# Altium PCB KATADC_V1-3.PcbDoc (part 6 of 7)
Units mm, origin at the board's own origin, x right, y up, seen from the top; angles counter-clockwise.
Board outline 127 x 85.85 mm, 6 copper layers (Top Layer, InnerPlane1, InnerPlane2, InnerPlane3, InnerPlane4, Bottom Layer), stack 1.255 mm thick; 189 components, 188 nets, 905 pads, 1090 vias.
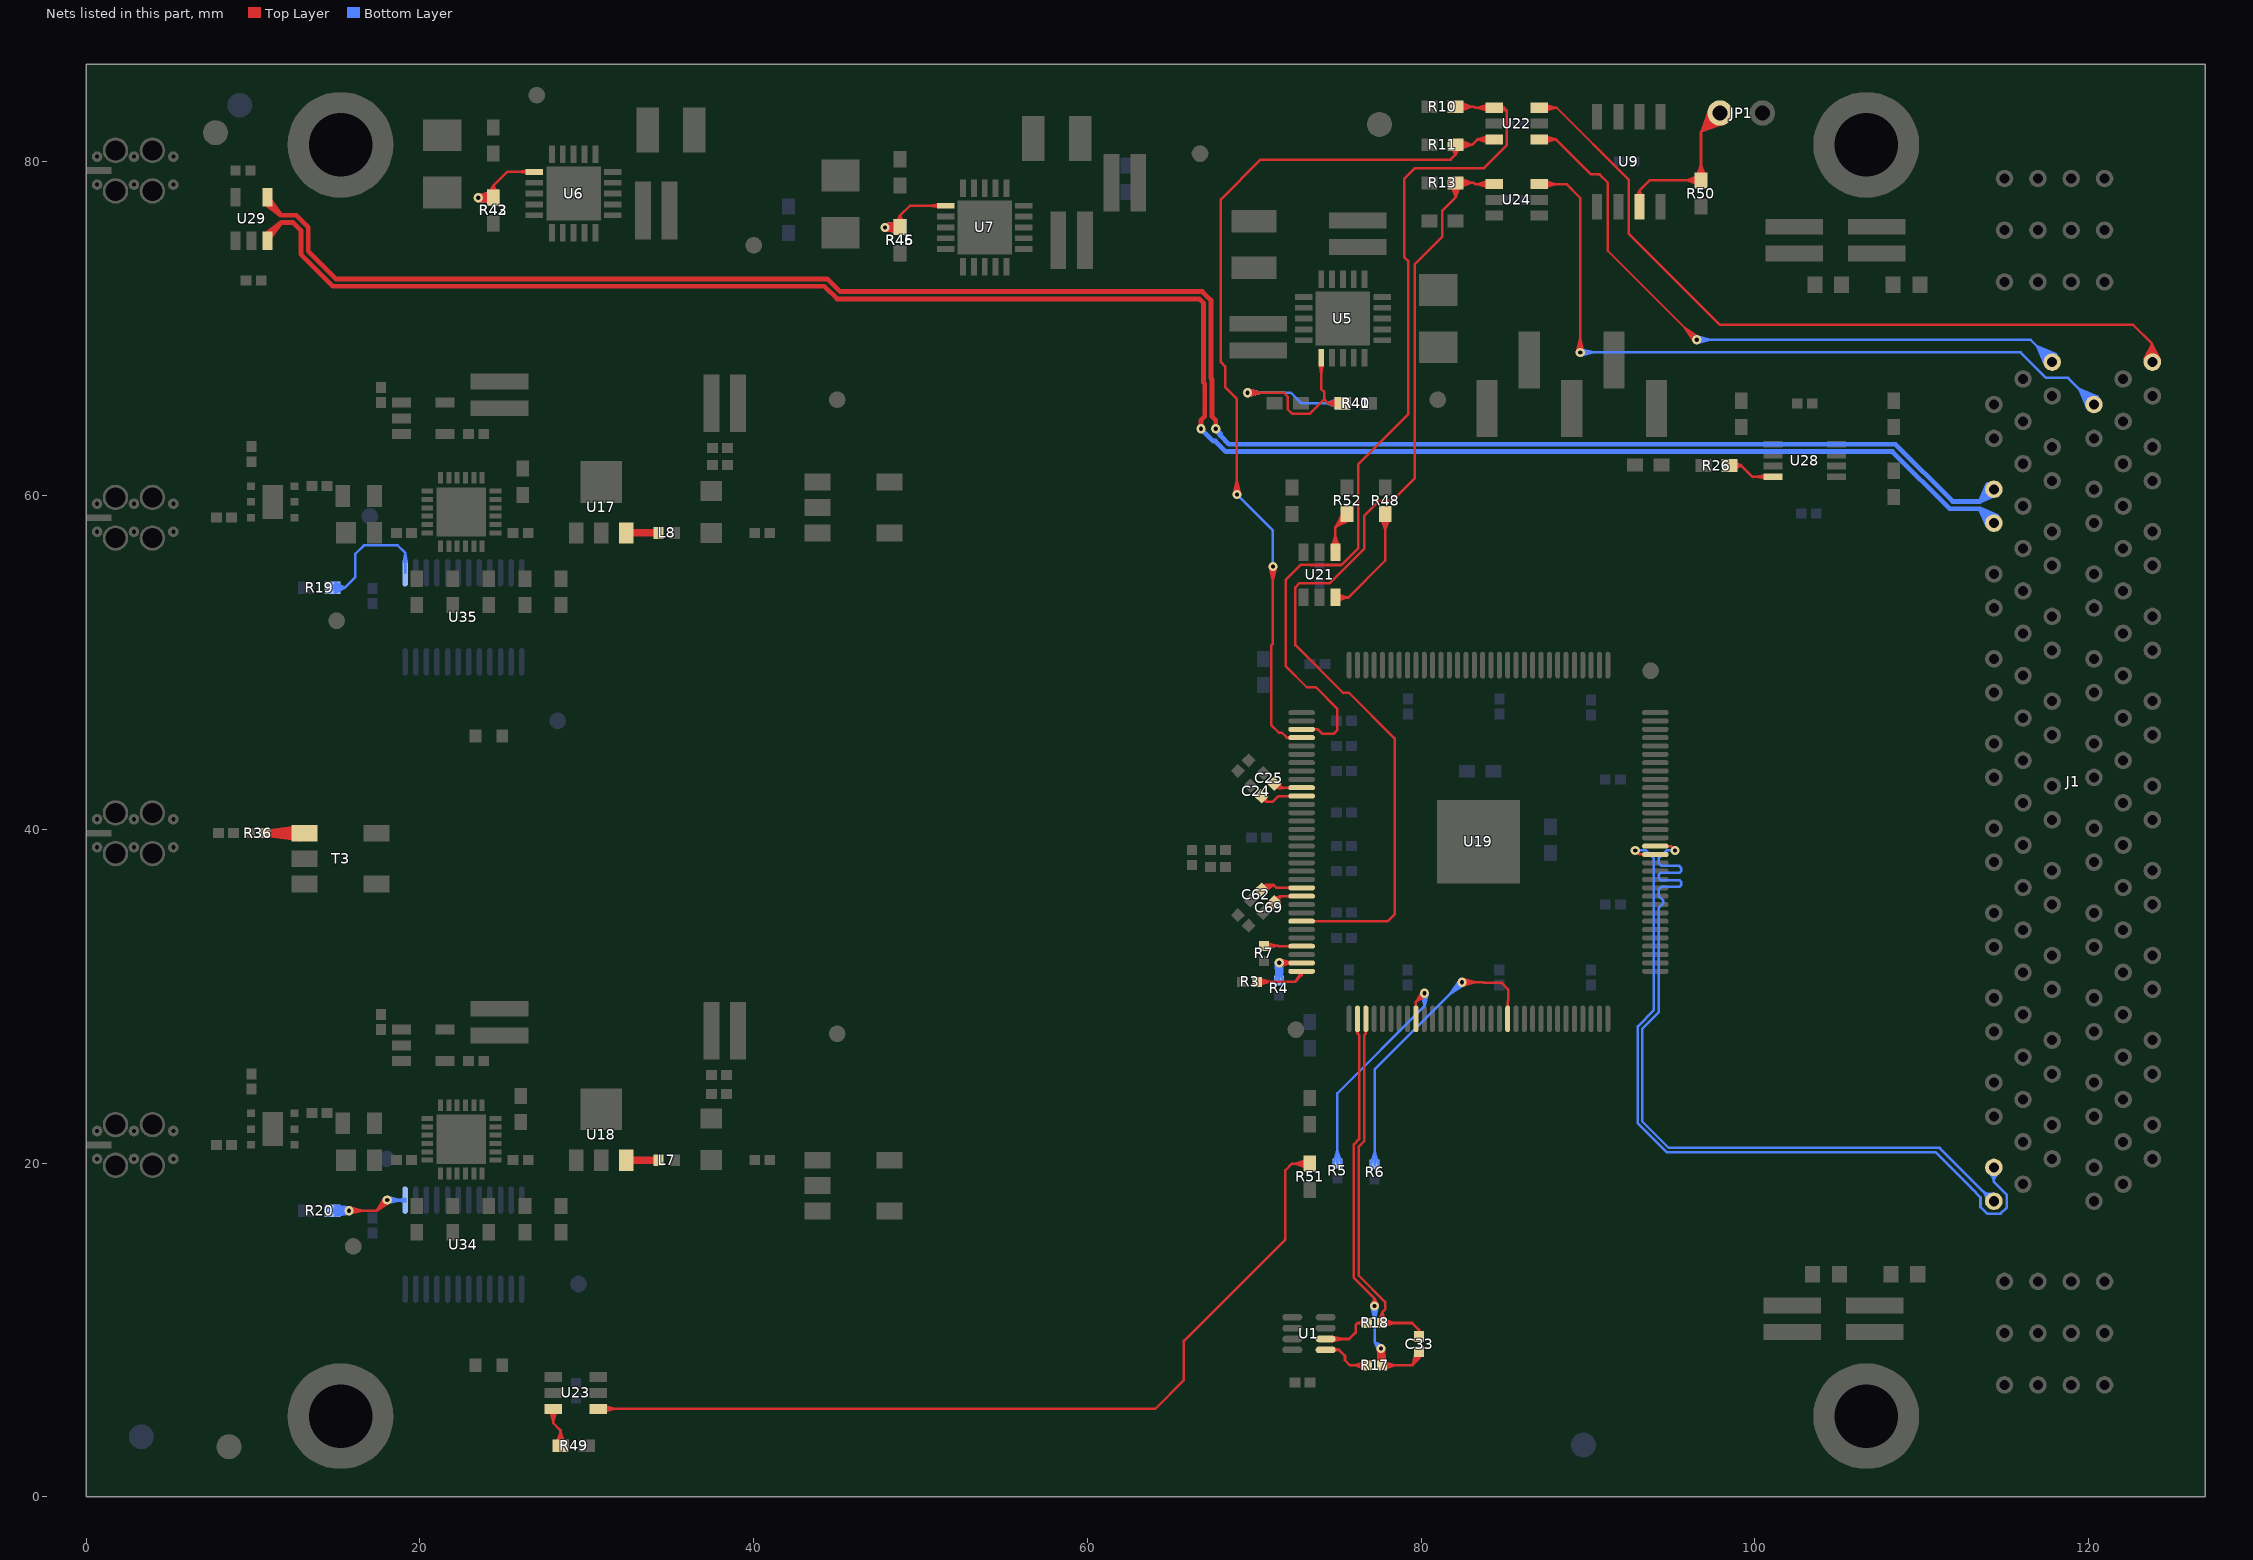
[diagram p10: the nets of this part, all layers, seen from the top]

## Via types
v1: diameter 0.55, hole 0.25, Top Layer to Bottom Layer, tented both sides, 1066 vias
v2: diameter 3.302, hole 2.2, Top Layer to Bottom Layer, tented both sides, 18 vias
v3: diameter 0.65, hole 0.25, Top Layer to Bottom Layer, tented both sides, 4 vias
v4: diameter 0.51, hole 0.25, Top Layer to Bottom Layer, tented both sides, 1 vias
v5: diameter 0.55, hole 0.25, Top Layer to Bottom Layer, 1 vias

## Nets (pads, with @x,y where several pads share a name; then routed paths per layer and width w, separated by ;. In a path a pad name is that pad's centre, name@x,y a point inside that pad or via, vN(x,y) a via of type N, cw(c..) or ccw(c..) an arc to the next point about the centre after c; other vN are vias at no path point) (continued)
NetJP1_1: JP1.1 R50.2 U9.7 | length 30.8
  Top Layer w0.152: U9.7@92.873,77.835 93.091,78.288 ; U9.7@93.091,77.31 93.091,78.288 ; U9.7@93.091,77.785 93.091,78.288 ; U9.7@93.309,77.835 93.091,78.288 ; R50.2@96.474,79.049 96.774,79.832 ; R50.2@96.622,79.008 96.774,79.832 ; R50.2@96.719,78.593 95.936,78.892 ; R50.2@96.719,79.192 95.936,78.892 ; R50.2@96.76,78.741 95.936,78.892 ; R50.2@96.76,79.044 95.936,78.892 ; R50.2@96.774,78.994 96.774,79.832 ; R50.2@96.926,79.008 96.774,79.832 ; R50.2@97.074,79.049 96.774,79.832 ; JP1.1@97.336,83.295 96.832,81.846 ; JP1.1@97.48,83.237 96.832,81.846 ; JP1.1@97.616,83.165 96.832,81.846 ; JP1.1@97.744,83.08 96.832,81.846 ; JP1.1@97.917,82.931 96.774,81.788 R50.2@96.774,78.892 93.695,78.892 93.091,78.288 ; JP1.1@98.066,82.758 96.832,81.846 ; JP1.1@98.151,82.63 96.832,81.846 ; JP1.1@98.223,82.494 96.832,81.846 ; JP1.1@98.281,82.35 96.832,81.846
NetL7_1: L7.1 U18.3 | length 3.6
  Top Layer w0.443: U18.3@32.36,20.172 L7.1@34.298,20.172 U18.3@32.668,20.172
NetL8_1: L8.1 U17.3 | length 7
  Top Layer w0.443: U17.3@32.667,57.768 L8.1@34.298,57.764 ; U17.3@32.668,57.785 L8.1@34.298,57.764 ; L8.1@34.121,57.785 U17.3@32.36,57.764 32.36,57.785 34.29,57.785 L8.1@34.298,57.764
NetR3_2: R3.2 U19.32 | length 5.5
  Top Layer w0.152: R3.2@70.173,30.861 72.433,30.861 72.839,31.267 ; R3.2@70.206,30.64 70.93,30.861 R3.2@70.206,31.082 ; 72.478,30.906 U19.32@72.839,31.493 ; 72.839,31.267 U19.32@72.839,31.493 ; 72.839,31.267 U19.32@72.839,31.493
NetR4_2: R4.2 U19.31 | length 16.8
  Top Layer w0.152: v1@71.523,31.807 U19.31@72.335,31.998 ; v1@71.527,31.807 U19.31@72.189,31.993 ; v1@71.526,32.201 U19.31@72.335,31.998 ; v1@71.533,32.2 U19.31@72.189,31.993 ; v1@71.582,31.998 U19.31@72.189,31.993 ; U19.31@72.839,31.993 72.839,31.998 71.501,31.998 v1(71.501,32.004) ; v1(71.501,32.004) U19.31@72.335,31.998 ; v1(71.501,32.004) U19.31@72.189,31.993
  Bottom Layer w0.152: R4.2@71.254,30.963 71.476,31.687 R4.2@71.697,30.963 ; v1@71.303,31.986 R4.2@71.476,31.17 ; v1@71.303,32.024 R4.2@71.316,31.166 ; v1@71.31,31.95 R4.2@71.642,31.142 ; R4.2@71.476,30.93 71.476,31.979 v1(71.501,32.004) ; v1@71.689,31.939 R4.2@71.316,31.166 ; v1@71.698,31.974 R4.2@71.476,31.17 ; v1@71.7,32.014 R4.2@71.642,31.142 ; R4.2@71.316,31.166 v1(71.501,32.004) ; R4.2@71.476,31.17 v1(71.501,32.004) ; v1(71.501,32.004) R4.2@71.642,31.142
NetR5_2: R5.2 U19.41 | length 19.7
  Top Layer w0.152: U19.41@79.689,28.643 79.689,29.651 ; U19.41@79.689,29.293 79.689,29.651 ; v1@80.055,30.296 79.689,29.651 ; v1@80.334,30.017 79.689,29.651 ; 79.689,29.651 v1(80.213,30.175) 79.689,29.651
  Bottom Layer w0.152: R5.2@74.759,20.016 74.981,20.74 R5.2@75.202,20.016 ; R5.2@74.981,19.983 74.981,24.182 80.213,29.414 ; v1@80.016,30.149 80.213,29.414 ; v1(80.213,30.175) 80.213,29.414 ; v1@80.41,30.149 80.213,29.414
NetR6_2: R6.2 U19.52 | length 24.4
  Top Layer w0.152: v1(82.448,30.836) 83.718,30.836 83.744,30.81 84.811,30.81 85.213,30.408 85.213,29.718 85.189,29.694 ; v1@82.472,30.638 83.282,30.836 v1@82.472,31.033 ; U19.52@85.189,28.643 85.189,29.694 ; U19.52@85.189,29.293 85.189,29.694
  Bottom Layer w0.152: R6.2@76.995,19.939 77.216,20.664 R6.2@77.437,19.939 ; R6.2@77.216,19.906 77.216,25.612 82.444,30.84 v1(82.448,30.836) 81.744,30.14 ; v1@82.295,30.962 81.744,30.14 ; v1@82.573,30.681 81.744,30.14
NetR7_2: R7.2 U19.29 | length 4.4
  Top Layer w0.152: R7.2@70.579,33.011 71.45,33.011 71.468,32.993 U19.29@72.839,32.993 ; R7.2@70.612,32.789 71.336,33.011 R7.2@70.612,33.232 ; 71.582,32.993 U19.29@72.189,32.993
NetR17_1: R17.1 U1.1 | length 5.8
  Top Layer w0.152: U1.1@74.279,8.804 75.082,8.804 ; U1.1@74.679,8.804 75.082,8.804 ; U1.1@74.698,8.682 75.082,8.804 ; U1.1@74.698,8.926 75.082,8.804 ; R17.1@76.733,7.653 76.009,7.874 R17.1@76.733,8.095 ; R17.1@76.766,7.874 75.743,7.874 75.438,8.179 75.438,8.448 75.082,8.804
NetR18_1: R18.1 U1.2 | length 6.3
  Top Layer w0.152: U1.2@74.279,9.454 75.692,9.454 76.073,9.835 76.073,10.287 76.2,10.414 ; U1.2@74.679,9.454 75.336,9.454 ; U1.2@74.691,9.331 75.336,9.454 ; U1.2@74.691,9.577 75.336,9.454 ; R18.1@76.722,10.195 76.2,10.414 ; R18.1@76.722,10.633 76.2,10.414 ; R18.1@76.766,10.414 76.2,10.414
NetR19_2: R19.2 U35.1 | length 12.4
  Bottom Layer w0.152: R19.2@14.757,54.483 15.494,54.483 ; R19.2@14.859,54.483 15.494,54.483 ; R19.2@14.877,54.332 15.494,54.483 ; R19.2@14.877,54.634 15.494,54.483 ; R19.2@14.932,54.187 15.494,54.483 ; R19.2@14.932,54.779 15.494,54.483 ; U35.1@19.025,56.04 19.113,56.578 ; U35.1@19.113,55.372 19.113,56.578 ; U35.1@19.113,56.032 19.113,56.578 ; U35.1@19.202,56.04 19.113,56.578 ; 15.494,54.483 16.129,55.118 16.129,56.515 16.637,57.023 18.669,57.023 19.113,56.578
NetR20_2: R20.2 U34.1 | length 30.4
  Top Layer w0.152: v1(15.748,17.145) 17.399,17.145 ; v1@15.772,16.948 16.582,17.145 v1@15.772,17.342 ; v1@17.879,17.904 17.399,17.145 ; v1@18.158,17.625 17.399,17.145 ; 17.399,17.145 v1(18.034,17.78) 17.399,17.145
  Bottom Layer w0.152: R20.2@14.757,17.145 v1(15.748,17.145) ; R20.2@14.859,17.145 v1@15.697,17.145 ; R20.2@14.873,16.993 v1@15.697,17.145 ; R20.2@14.873,17.297 v1@15.697,17.145 ; R20.2@14.914,16.845 v1@15.697,17.145 ; R20.2@14.914,17.445 v1@15.697,17.145 ; v1@15.66,16.967 R20.2@14.941,17.435 ; v1@15.66,17.323 R20.2@14.941,16.855 ; v1@15.691,16.955 R20.2@14.921,17.288 ; v1@15.691,17.335 R20.2@14.921,17.002 ; v1@15.758,16.947 R20.2@14.921,17.002 ; v1@15.758,17.343 R20.2@14.921,17.288 ; v1@15.793,16.951 R20.2@14.941,16.855 ; v1@15.793,17.339 R20.2@14.941,17.435 ; v1(18.034,17.78) U34.1@19.113,17.78 ; v1@18.058,17.583 18.868,17.78 v1@18.058,17.977 ; U34.1@19.107,17.691 18.491,17.78 U34.1@19.107,17.869 ; R20.2@14.914,17.145 15.724,16.948 R20.2@14.914,17.145 ; R20.2@14.914,17.145 15.724,17.342 R20.2@14.914,17.145 ; R20.2@14.914,17.145 v1(15.748,17.145) ; R20.2@14.921,17.002 v1(15.748,17.145) ; R20.2@14.921,17.288 v1(15.748,17.145) ; R20.2@14.941,16.855 v1(15.748,17.145) ; R20.2@14.941,17.435 v1(15.748,17.145)
NetR26_1: R26.1 U28.8 | length 7.8
  Top Layer w0.152: R26.1@98.489,61.804 99.177,61.804 ; R26.1@98.591,61.804 99.177,61.804 ; R26.1@98.611,61.653 99.177,61.804 ; R26.1@98.611,61.955 99.177,61.804 ; R26.1@98.67,61.51 99.177,61.804 ; R26.1@98.67,62.098 99.177,61.804 ; U28.8@100.71,61.005 100.065,61.128 ; U28.8@100.71,61.251 100.065,61.128 ; U28.8@100.722,61.128 100.065,61.128 ; U28.8@101.097,61.128 99.853,61.128 99.177,61.804
NetR36_2: R36.2 T3.1 | length 12.7
  Top Layer w0.443: T3.1@12.363,39.554 R36.2@10.737,39.767 ; T3.1@12.363,39.98 R36.2@10.737,39.767 ; T3.1@12.367,39.767 R36.2@10.737,39.767 ; T3.1@12.785,39.489 R36.2@10.976,39.767 ; T3.1@12.785,40.045 R36.2@10.976,39.767 ; T3.1@12.806,39.767 R36.2@10.976,39.767 ; T3.1@13.081,39.767 R36.2@10.737,39.767
NetR40_2: R40.2 R41.2 U5.16 | length 28.9
  Top Layer w0.152: v1(69.596,66.167) 71.773,66.167 72.009,65.931 72.009,65.168 72.28,64.897 73.312,64.897 74.201,65.786 ; v1@69.62,65.97 70.43,66.167 v1@69.62,66.364 ; U5.16@73.913,67.904 74.011,67.28 ; U5.16@74.011,67.912 74.011,67.28 ; U5.16@74.011,68.262 74.011,66.4 74.201,66.21 74.201,65.786 ; U5.16@74.109,67.904 74.011,67.28 ; R40.2@75.123,65.233 74.422,65.532 ; R40.2@75.123,65.831 74.422,65.532 ; R40.2@75.169,65.38 74.422,65.532 ; R40.2@75.169,65.684 74.422,65.532 ; R40.2@75.184,65.532 74.422,65.532 ; R40.2@75.286,65.532 74.422,65.532 ; 74.201,65.786 74.201,65.753 74.422,65.532
  Bottom Layer w0.152: v1(69.596,66.167) 72.188,66.167 72.823,65.532 R41.2@75.286,65.532 ; v1@69.62,65.97 70.43,66.167 v1@69.62,66.364 ; R41.2@75.129,65.232 74.346,65.532 ; R41.2@75.129,65.832 74.346,65.532 ; R41.2@75.17,65.38 74.346,65.532 ; R41.2@75.17,65.684 74.346,65.532 ; R41.2@75.184,65.532 74.346,65.532
NetR42_2: R42.2 R43.2 U6.16 | length 47.3
  Top Layer w0.152: v1@23.444,78.043 R42.2@24.298,78.165 ; v1@23.456,77.656 R42.2@24.306,77.586 ; v1@23.479,78.049 R42.2@24.32,78.018 ; v1@23.49,77.652 R42.2@24.324,77.732 ; v1@23.513,78.049 R42.2@24.329,77.875 ; v1@23.519,77.654 24.329,77.851 v1@23.519,78.048 ; v1@23.524,77.654 R42.2@24.329,77.875 ; v1@23.546,78.043 R42.2@24.324,77.732 ; v1@23.557,77.662 R42.2@24.32,78.018 ; v1@23.578,78.031 R42.2@24.306,77.586 ; v1@23.588,77.676 R42.2@24.298,78.165 ; R42.2@24.09,78.058 24.384,78.562 ; R42.2@24.233,77.998 24.384,78.562 ; R42.2@24.32,78.174 v1@23.546,77.851 ; R42.2@24.338,77.575 v1@23.546,77.851 ; R42.2@24.366,78.028 v1@23.546,77.851 ; R42.2@24.375,77.724 v1@23.546,77.851 ; R42.2@24.384,77.978 24.384,78.562 ; R42.2@24.535,77.998 24.384,78.562 ; R42.2@24.678,78.058 24.384,78.562 ; U6.16@26.502,79.307 25.878,79.405 ; U6.16@26.502,79.503 25.878,79.405 ; U6.16@26.51,79.405 25.878,79.405 ; U6.16@26.86,79.405 25.227,79.405 24.384,78.562 ; v1(23.495,77.851) 24.384,77.851 R42.2@24.384,77.876 ; v1(23.495,77.851) R42.2@24.306,77.586 ; v1(23.495,77.851) R42.2@24.298,78.165 ; v1(23.495,77.851) R42.2@24.324,77.732 ; v1(23.495,77.851) R42.2@24.32,78.018 ; v1(23.495,77.851) R42.2@24.329,77.875 ; v1@23.546,77.851 R42.2@24.384,77.876 ; R42.2@24.384,77.876 24.384,78.562
  Bottom Layer w0.152: v1@23.444,78.043 R43.2@24.298,78.165 ; v1@23.456,77.656 R43.2@24.306,77.586 ; v1@23.479,78.049 R43.2@24.32,78.018 ; v1@23.49,77.652 R43.2@24.324,77.732 ; v1@23.513,78.049 R43.2@24.329,77.875 ; v1@23.519,77.654 24.329,77.851 v1@23.519,78.048 ; v1@23.524,77.654 R43.2@24.329,77.875 ; v1@23.546,78.043 R43.2@24.324,77.732 ; v1@23.557,77.662 R43.2@24.32,78.018 ; v1@23.578,78.031 R43.2@24.306,77.586 ; v1@23.588,77.676 R43.2@24.298,78.165 ; R43.2@24.32,78.174 v1@23.546,77.851 ; R43.2@24.338,77.575 v1@23.546,77.851 ; R43.2@24.366,78.028 v1@23.546,77.851 ; R43.2@24.375,77.724 v1@23.546,77.851 ; v1(23.495,77.851) 24.384,77.851 R43.2@24.384,77.876 v1@23.546,77.851 ; v1(23.495,77.851) R43.2@24.306,77.586 ; v1(23.495,77.851) R43.2@24.298,78.165 ; v1(23.495,77.851) R43.2@24.324,77.732 ; v1(23.495,77.851) R43.2@24.32,78.018 ; v1(23.495,77.851) R43.2@24.329,77.875
NetR45_2: R45.2 R46.2 U7.16 | length 47.4
  Top Layer w0.152: v1@47.828,76.265 R45.2@48.682,76.387 ; v1@47.84,75.878 R45.2@48.69,75.808 ; v1@47.863,76.271 R45.2@48.704,76.24 ; v1@47.874,75.874 R45.2@48.708,75.954 ; v1@47.897,76.271 R45.2@48.713,76.097 ; v1@47.903,75.876 48.713,76.073 v1@47.903,76.27 ; v1@47.908,75.876 R45.2@48.713,76.097 ; v1@47.93,76.265 R45.2@48.708,75.954 ; v1@47.941,75.884 R45.2@48.704,76.24 ; v1@47.962,76.253 R45.2@48.69,75.808 ; v1@47.972,75.898 R45.2@48.682,76.387 ; R45.2@48.474,76.28 48.768,76.784 ; R45.2@48.617,76.22 48.768,76.784 ; R45.2@48.704,76.396 v1@47.93,76.073 ; R45.2@48.722,75.797 v1@47.93,76.073 ; R45.2@48.75,76.25 v1@47.93,76.073 ; R45.2@48.759,75.946 v1@47.93,76.073 ; R45.2@48.768,76.2 48.768,76.784 ; R45.2@48.919,76.22 48.768,76.784 ; R45.2@49.062,76.28 48.768,76.784 ; U7.16@51.14,77.275 50.516,77.373 ; U7.16@51.14,77.471 50.516,77.373 ; U7.16@51.148,77.373 50.516,77.373 ; U7.16@51.498,77.373 49.357,77.373 48.768,76.784 ; v1(47.879,76.073) 48.768,76.073 R45.2@48.768,76.098 ; v1(47.879,76.073) R45.2@48.69,75.808 ; v1(47.879,76.073) R45.2@48.682,76.387 ; v1(47.879,76.073) R45.2@48.708,75.954 ; v1(47.879,76.073) R45.2@48.704,76.24 ; v1(47.879,76.073) R45.2@48.713,76.097 ; v1@47.93,76.073 R45.2@48.768,76.098 ; R45.2@48.768,76.098 48.768,76.784
  Bottom Layer w0.152: v1@47.828,76.265 R46.2@48.682,76.387 ; v1@47.84,75.878 R46.2@48.69,75.808 ; v1@47.863,76.271 R46.2@48.704,76.24 ; v1@47.874,75.874 R46.2@48.708,75.954 ; v1@47.897,76.271 R46.2@48.713,76.097 ; v1@47.903,75.876 48.713,76.073 v1@47.903,76.27 ; v1@47.908,75.876 R46.2@48.713,76.097 ; v1@47.93,76.265 R46.2@48.708,75.954 ; v1@47.941,75.884 R46.2@48.704,76.24 ; v1@47.962,76.253 R46.2@48.69,75.808 ; v1@47.972,75.898 R46.2@48.682,76.387 ; R46.2@48.704,76.396 v1@47.93,76.073 ; R46.2@48.722,75.797 v1@47.93,76.073 ; R46.2@48.75,76.25 v1@47.93,76.073 ; R46.2@48.759,75.946 v1@47.93,76.073 ; v1(47.879,76.073) 48.768,76.073 R46.2@48.768,76.098 v1@47.93,76.073 ; v1(47.879,76.073) R46.2@48.69,75.808 ; v1(47.879,76.073) R46.2@48.682,76.387 ; v1(47.879,76.073) R46.2@48.708,75.954 ; v1(47.879,76.073) R46.2@48.704,76.24 ; v1(47.879,76.073) R46.2@48.713,76.097
NetR48_1: R48.1 U21.3 | length 12.4
  Top Layer w0.152: U21.3@74.864,53.895 75.638,53.895 77.851,56.108 R48.1@77.851,58.903 ; U21.3@74.897,53.674 75.621,53.895 U21.3@74.897,54.116 ; R48.1@77.551,58.746 77.851,57.963 ; R48.1@77.699,58.787 77.851,57.963 ; R48.1@77.851,58.801 77.851,57.963 ; R48.1@78.003,58.787 77.851,57.963 ; R48.1@78.151,58.746 77.851,57.963
NetR49_1: R49.1 U23.3 | length 7.3
  Top Layer w0.152: U23.3@27.766,5.24 27.987,4.516 U23.3@28.208,5.24 ; U23.3@27.987,5.273 27.987,4.419 28.423,3.983 R49.1@28.423,3.048 ; R49.1@28.123,3.103 28.423,3.886 ; R49.1@28.271,3.062 28.423,3.886 ; R49.1@28.574,3.062 28.423,3.886 ; R49.1@28.722,3.103 28.423,3.886
NetR51_2: R51.2 U23.4 | length 58.2
  Top Layer w0.152: U23.4@30.687,5.273 64.074,5.273 65.786,6.985 65.786,9.347 71.831,15.392 71.857,15.392 71.857,19.558 72.263,19.964 R51.2@73.33,19.964 ; U23.4@30.912,5.273 31.669,5.273 ; U23.4@30.945,5.052 31.669,5.273 ; U23.4@30.945,5.494 31.669,5.273 ; R51.2@73.274,19.665 72.492,19.964 ; R51.2@73.274,20.264 72.492,19.964 ; R51.2@73.316,19.813 72.492,19.964 ; R51.2@73.316,20.116 72.492,19.964
NetR52_2: R52.2 U21.4 | length 9.7
  Top Layer w0.152: U21.4@74.643,56.853 74.864,57.577 ; U21.4@74.864,56.595 74.864,58.1 R52.2@75.565,58.801 ; U21.4@74.864,56.82 74.864,57.577 ; U21.4@75.085,56.853 74.864,57.577 ; R52.2@75.318,58.98 74.883,58.119 ; R52.2@75.449,58.9 74.883,58.119 ; R52.2@75.565,58.903 R52.2@75.565,58.801 ; R52.2@75.664,58.685 74.883,58.119 ; R52.2@75.744,58.554 74.883,58.119 ; 74.883,58.119 R52.2@75.565,58.801
OR+/DCLK2+: J1.F19 U19.79 | length 48.1
  Top Layer w0.152: v1(92.837,38.735) 93.079,38.493 U19.79@94.039,38.493
  Bottom Layer w0.152: v1(92.837,38.735) 93.472,38.735 93.955,38.252 93.955,29.159 92.991,28.196 92.991,22.376 94.715,20.652 106.959,20.652 ; 107.033,20.652 106.959,20.652 ; 113.081,18.39 112.979,18.491 ; J1.F19@113.975,19.475 114.147,19.303 cw(c113.716,18.873) 114.325,18.873 ; J1.F19@114.325,19.74 114.325,18.873 ; J1.F19@114.675,19.475 114.503,19.303 ccw(c114.934,18.873) 114.325,18.873 ; 106.959,20.652 110.819,20.652 112.979,18.491 ; 112.979,18.491 113.525,17.945 113.525,17.361 113.919,16.967 114.732,16.967 115.113,17.348 115.113,18.085 114.325,18.873
OR-/DCLK2-: J1.F20 U19.80 | length 49.1
  Top Layer w0.152: U19.80@94.039,38.993 94.971,38.993 ; U19.80@94.689,38.993 94.971,38.993 ; v1(95.225,38.735) 95.225,38.739 94.971,38.993
  Bottom Layer w0.152: 95.148,36.551 94.386,36.551 94.234,36.398 94.234,36.017 94.513,35.738 94.513,35.56 94.234,35.281 94.234,29.032 93.243,28.042 93.243,22.504 94.844,20.904 111.074,20.904 113.679,18.299 ; 95.174,36.551 95.479,36.551 95.58,36.652 95.58,36.855 95.479,36.957 94.361,36.957 94.234,37.084 94.234,37.262 94.361,37.389 95.479,37.389 95.58,37.49 95.58,37.694 95.453,37.821 94.386,37.821 94.234,37.973 94.234,38.252 94.717,38.735 v1(95.225,38.735) ; 113.68,18.299 114.297,17.682 J1.F20@114.3,17.678 ; J1.F20@113.875,17.6 113.875,17.826 ccw(c113.206,17.826) 113.68,18.299 ; J1.F20@113.9,17.65 113.9,17.766 ccw(c113.146,17.766) 113.68,18.298 ; J1.F20@114.325,18.15 114.04,18.15 cw(c114.04,18.66) 113.68,18.298
PD_19: R13.2 U19.26 U24.4 | length 70.5
  Top Layer w0.152: U19.26@72.839,34.493 78.003,34.493 78.41,34.9 78.41,45.449 75.675,48.184 75.317,48.184 72.461,51.04 72.461,54.504 72.694,54.737 74.513,54.737 76.581,56.805 76.581,58.784 77.487,59.69 78.25,59.69 79.629,61.069 79.629,73.876 81.28,75.527 81.28,77.089 82.067,77.876 R13.2@82.067,78.74 83.167,78.74 83.233,78.674 U24.4@84.375,78.674 ; U19.26@73.489,34.493 74.096,34.493 ; R13.2@81.768,78.685 82.067,77.902 ; R13.2@81.916,78.726 82.067,77.902 ; R13.2@82.169,78.74 83.007,78.74 ; R13.2@82.183,78.588 83.007,78.74 ; R13.2@82.183,78.892 83.007,78.74 ; R13.2@82.219,78.726 82.067,77.902 ; R13.2@82.224,78.44 83.007,78.74 ; R13.2@82.224,79.04 83.007,78.74 ; R13.2@82.367,78.685 82.067,77.902 ; U24.4@84.117,78.453 83.393,78.674 ; U24.4@84.117,78.895 83.393,78.674 ; U24.4@84.15,78.674 83.393,78.674
PD_25: J1.C1 U24.3 | length 57.1
  Top Layer w0.152: U24.3@87.075,78.674 88.712,78.674 89.535,77.851 v1(89.535,68.58) ; U24.3@87.3,78.674 88.057,78.674 ; U24.3@87.333,78.453 88.057,78.674 ; U24.3@87.333,78.895 88.057,78.674 ; v1@89.338,68.604 89.535,69.414 v1@89.732,68.604
  Bottom Layer w0.152: v1(89.535,68.58) 115.928,68.58 117.452,67.056 118.774,67.056 J1.C1@120.3,65.53 ; v1@89.559,68.383 90.369,68.58 v1@89.559,68.777 ; J1.C1@119.907,65.265 119.427,66.403 ; J1.C1@120.045,65.334 119.427,66.403 ; J1.C1@120.173,65.419 119.427,66.403 ; J1.C1@120.411,65.657 119.427,66.403 ; J1.C1@120.496,65.785 119.427,66.403 ; J1.C1@120.565,65.923 119.427,66.403
SER_CLK: J1.A1 U22.3 | length 53.8
  Top Layer w0.152: U22.3@87.075,83.246 88.131,83.246 92.456,78.921 92.456,75.692 97.917,70.231 122.682,70.231 123.8,69.113 J1.A1@123.8,68.07 ; U22.3@87.3,83.246 88.057,83.246 ; U22.3@87.333,83.025 88.057,83.246 ; U22.3@87.333,83.467 88.057,83.246 ; J1.A1@123.34,68.181 123.8,69.077 ; J1.A1@123.483,68.121 123.8,69.077 ; J1.A1@123.632,68.084 123.8,69.077 ; J1.A1@123.969,68.084 123.8,69.077 ; J1.A1@124.117,68.121 123.8,69.077 ; J1.A1@124.261,68.181 123.8,69.077
SER_CLK_19: R10.2 U19.3 U22.4 | length 64.5
  Top Layer w0.152: U19.3@72.839,45.993 73.812,45.993 ; U19.3@73.489,45.993 73.812,45.993 ; R10.2@82.067,83.312 83.167,83.312 83.233,83.246 U22.4@84.375,83.246 84.976,83.246 ; R10.2@82.169,83.312 83.007,83.312 ; R10.2@82.183,83.16 83.007,83.312 ; R10.2@82.183,83.464 83.007,83.312 ; R10.2@82.224,83.012 83.007,83.312 ; R10.2@82.224,83.612 83.007,83.312 ; U22.4@84.117,83.025 83.393,83.246 ; U22.4@84.117,83.467 83.393,83.246 ; U22.4@84.15,83.246 83.393,83.246 ; U22.4@84.583,83.023 85.129,83.094 ; U22.4@84.704,83.444 85.129,83.094 ; 73.812,45.993 74.085,45.72 74.752,45.72 74.982,45.95 74.982,47.22 73.689,48.514 73.146,48.514 71.882,49.778 71.882,54.954 72.795,55.867 73.374,55.867 73.4,55.841 75.223,55.841 76.238,56.857 76.238,61.887 79.219,64.868 79.219,74.062 78.977,74.304 78.977,78.97 79.636,79.629 83.77,79.629 85.129,80.987 85.129,83.094 ; U22.4@84.6,83.246 85.129,83.094 ; U22.4@84.6,83.246 84.976,83.246 ; U22.4@84.6,83.246 84.976,83.246 ; 84.976,83.246 85.129,83.094 ; 84.976,83.246 84.667,83.46 84.976,83.246 ; 84.976,83.246 84.667,83.032 84.976,83.246
SER_DATA: J1.D1 U22.1 | length 54.2
  Top Layer w0.152: U22.1@87.075,81.346 88.072,81.346 90.17,79.248 90.702,79.248 91.186,78.764 91.186,74.676 v1(96.52,69.342) 95.82,70.042 ; U22.1@87.3,81.346 88.057,81.346 ; U22.1@87.333,81.125 88.057,81.346 ; U22.1@87.333,81.567 88.057,81.346 ; v1@96.366,69.216 95.82,70.042 ; v1@96.646,69.496 95.82,70.042
  Bottom Layer w0.152: v1(96.52,69.342) 116.528,69.342 117.8,68.07 116.927,68.943 ; v1@96.544,69.145 97.354,69.342 v1@96.544,69.539 ; J1.D1@117.407,67.805 116.927,68.943 ; J1.D1@117.545,67.874 116.927,68.943 ; J1.D1@117.673,67.959 116.927,68.943 ; J1.D1@117.911,68.197 116.927,68.943 ; J1.D1@117.996,68.325 116.927,68.943 ; J1.D1@118.065,68.463 116.927,68.943
SER_DATA_19: R11.2 U19.4 U22.6 | length 65.6
  Top Layer w0.152: v1@68.764,60.095 68.961,60.905 v1@69.158,60.095 ; v1(68.961,60.071) 68.961,65.789 68.25,66.5 68.25,67.75 68,68 68,77.75 70.387,80.137 81.763,80.137 82.067,80.442 ; v1@70.923,55.729 71.12,54.919 v1@71.317,55.729 ; v1(71.12,55.753) 71.12,51.119 71.006,51.005 71.006,46.263 71.479,45.79 71.655,45.79 71.952,45.493 ; U19.4@72.189,45.493 71.952,45.493 ; U19.4@72.839,45.493 71.952,45.493 ; R11.2@81.773,80.946 82.067,80.442 ; R11.2@81.916,81.006 82.067,80.442 ; R11.2@82.169,81.026 83.007,81.026 ; R11.2@82.183,80.874 83.007,81.026 ; R11.2@82.183,81.178 83.007,81.026 ; R11.2@82.218,81.006 82.067,80.442 ; R11.2@82.224,80.726 83.007,81.026 ; R11.2@82.224,81.326 83.007,81.026 ; R11.2@82.362,80.946 82.067,80.442 ; U22.6@84.117,81.125 83.393,81.346 ; U22.6@84.117,81.567 83.393,81.346 ; U22.6@84.15,81.346 83.393,81.346 ; U22.6@84.375,81.346 83.378,81.346 83.058,81.026 R11.2@82.067,81.026 82.067,80.442
  Bottom Layer w0.152: v1(68.961,60.071) 71.12,57.912 v1(71.12,55.753)
SYNC+: J1.F3 U29.4 | length 124.2
  Top Layer w0.284: U29.4@10.752,77.512 11.688,76.799 ; U29.4@10.856,77.881 U29.4@10.856,77.631 ; U29.4@10.975,77.735 11.688,76.799 ; v1(67.691,64.008) 67.691,64.516 67.465,64.742 67.465,66.972 67.401,67.036 67.401,71.718 66.892,72.227 45.175,72.227 44.413,72.989 14.949,72.989 13.299,74.639 13.299,76.076 12.576,76.799 11.688,76.799 ; U29.4@10.856,77.631 11.688,76.799 ; U29.4@10.856,77.631 11.688,76.799
  Bottom Layer w0.284: J1.F3@113.964,60.681 113.504,59.653 ; J1.F3@114.531,60.114 113.504,59.653 ; 67.986,63.577 67.986,63.713 v1(67.691,64.008) 67.986,63.577 ; 67.986,63.577 68.486,63.077 108.427,63.077 111.852,59.653 113.504,59.653 ; 113.504,59.653 114.278,60.427 114.3,60.45 113.504,59.653
SYNC-: J1.F4 U29.3 | length 123.9
  Top Layer w0.284: U29.3@10.752,75.65 11.688,76.363 ; U29.3@10.856,75.281 U29.3@10.856,75.531 ; U29.3@10.975,75.427 11.688,76.363 ; v1(66.802,64.008) 66.802,64.516 67.028,64.742 67.028,66.703 66.965,66.766 66.965,71.538 66.712,71.791 44.995,71.791 44.233,72.553 14.769,72.553 12.863,74.459 12.863,75.895 12.395,76.363 11.688,76.363 ; U29.3@10.856,75.531 11.688,76.363 ; U29.3@10.856,75.531 11.688,76.363
  Bottom Layer w0.284: v1(66.802,64.008) 67.542,63.268 67.677,63.268 68.305,62.641 108.247,62.641 111.671,59.217 113.504,59.217 ; J1.F4@113.964,58.189 113.504,59.217 ; J1.F4@114.531,58.756 113.504,59.217 ; 113.504,59.217 114.3,58.42 113.504,59.217
TDIODE_N: C33.2 R18.2 U19.35 | length 26.1
  Top Layer w0.152: U19.35@76.689,27.993 76.689,27.762 ; U19.35@76.689,28.643 76.689,27.762 ; R18.2@77.446,10.453 77.666,11.049 ; R18.2@77.699,10.193 78.423,10.414 R18.2@77.699,10.635 ; R18.2@77.886,10.453 77.666,11.049 ; C33.2@79.669,9.686 79.883,9.995 ; C33.2@79.883,9.594 79.883,9.995 ; C33.2@79.883,9.619 79.883,9.995 ; C33.2@80.097,9.686 79.883,9.995 ; 76.689,27.762 76.591,27.665 76.591,21.309 76.276,20.993 76.276,13.246 77.844,11.677 77.844,11.227 77.666,11.049 ; 77.666,11.049 R18.2@77.666,10.414 79.464,10.414 79.883,9.995
TDIODE_P: C33.1 R17.2 U19.34 | length 46.3
  Top Layer w0.152: U19.34@76.189,27.993 76.189,27.762 ; U19.34@76.189,28.643 76.189,27.762 ; v1@77.022,11.474 77.216,11.875 ; v1(77.216,11.43) 77.216,11.875 ; v1@77.398,8.895 R17.2@77.477,8.055 ; v1@77.4,8.866 77.597,8.056 v1@77.794,8.866 ; v1@77.402,8.854 R17.2@77.65,8.056 ; v1@77.41,11.474 77.216,11.875 ; v1@77.413,8.815 R17.2@77.83,8.058 ; R17.2@77.443,7.887 v1@77.597,8.636 ; R17.2@77.699,7.653 78.423,7.874 R17.2@77.699,8.095 ; v1@77.789,8.839 R17.2@77.477,8.055 ; v1@77.793,8.921 R17.2@77.83,8.058 ; v1@77.795,8.879 R17.2@77.65,8.056 ; R17.2@77.884,7.927 v1@77.597,8.636 ; C33.1@79.672,8.745 79.487,7.896 ; C33.1@79.883,8.694 79.883,8.293 ; C33.1@80.067,8.542 79.487,7.896 ; 76.189,27.762 76.287,27.665 76.287,21.435 75.971,21.12 75.971,13.119 77.216,11.875 ; R17.2@77.477,8.055 v1(77.597,8.89) ; v1@77.597,8.636 R17.2@77.666,7.874 ; v1(77.597,8.89) 77.597,7.943 R17.2@77.666,7.874 ; v1(77.597,8.89) R17.2@77.83,8.058 ; v1(77.597,8.89) R17.2@77.65,8.056 ; R17.2@77.666,7.874 79.464,7.874 79.883,8.293 ; 79.487,7.896 C33.1@79.883,8.669 ; 79.883,8.293 80.097,8.602 79.883,8.293 ; 79.883,8.293 79.669,8.602 79.883,8.293 ; 79.883,8.293 C33.1@79.883,8.669 ; 79.883,8.293 C33.1@79.883,8.669
  Bottom Layer w0.152: v1@77.019,11.406 77.216,10.596 v1@77.413,11.406 ; v1(77.216,11.43) 77.216,9.271 ; v1@77.433,8.778 77.216,9.271 ; v1(77.597,8.89) 77.216,9.271 ; v1@77.709,9.054 77.216,9.271
VIN_I+: C24.2 U19.11 | length 4.6
  Top Layer w0.152: C24.2@70.329,41.761 70.739,41.656 ; C24.2@70.422,41.973 70.739,41.656 ; C24.2@70.44,41.955 70.739,41.656 ; C24.2@70.634,42.066 70.739,41.656 ; 71.582,41.993 U19.11@72.189,41.993 ; U19.11@72.839,41.993 71.457,41.993 71.12,41.656 70.739,41.656
VIN_I-: C25.2 U19.10 | length 6.2
  Top Layer w0.152: C25.2@71.137,42.503 71.694,42.451 ; C25.2@71.184,42.735 71.468,42.451 ; C25.2@71.345,42.889 71.694,42.451 ; U19.10@72.189,42.493 71.736,42.493 ; U19.10@72.839,42.493 71.736,42.493 ; C25.2@71.202,42.717 71.694,42.451 ; C25.2@71.202,42.717 71.468,42.451 ; C25.2@71.202,42.717 71.468,42.451 ; 71.468,42.451 71.694,42.451 ; 71.468,42.451 71.4,42.821 71.468,42.451 ; 71.468,42.451 71.098,42.519 71.468,42.451 ; 71.694,42.451 71.736,42.493
VIN_Q+: C62.2 U19.22 | length 7.8
  Top Layer w0.152: C62.2@70.393,36.623 71.153,36.67 ; C62.2@70.422,36.386 70.706,36.67 ; C62.2@70.548,36.208 71.153,36.67 ; 71.582,36.493 U19.22@72.189,36.493 ; U19.22@72.839,36.493 71.33,36.493 71.153,36.67 ; C62.2@70.44,36.404 70.706,36.67 ; C62.2@70.44,36.404 71.153,36.67 ; C62.2@70.44,36.404 70.706,36.67 ; 70.706,36.67 71.153,36.67 ; 70.706,36.67 70.336,36.602 70.706,36.67 ; 70.706,36.67 70.638,36.3 70.706,36.67
VIN_Q-: C69.2 U19.23 | length 3.9
  Top Layer w0.152: C69.2@71.083,35.832 71.553,35.993 ; C69.2@71.184,35.624 71.553,35.993 ; C69.2@71.202,35.642 71.553,35.993 ; C69.2@71.392,35.523 71.553,35.993 ; 71.582,35.993 U19.23@72.189,35.993 ; U19.23@72.839,35.993 71.553,35.993
pads on no net: AT12.2 AT12.3 AT12.15 AT22.2 AT22.3 AT22.15 F1.FiducialTop_Global F2.FiducialTop_Global F3.FiducialTop_Global F6.FiducialBot_Global F7.FiducialBot_Global F8.FiducialBot_Global J1.A2 J1.C2 J1.W3 J1.W5 J1.X3 J1.X5 J1.Y3 J1.Y5 J1.Z3 J1.Z5 P1.2 P1.4 P1.5 T1.2 T2.2 T3.2 U5.2 U5.3 U5.4 U5.9 U5.13 U5.14 U5.17 U6.2 U6.3 U6.4 U6.9 U6.13 U6.14 U6.17 U7.2 U7.3 U7.4 U7.13 U7.14 U7.17 U19.63 U19.98 U19.109 U19.120 U34.14 U34.15 U34.16 U34.17 U34.18 U34.19 U34.20 U35.14 U35.15 U35.16 U35.17 U35.18 U35.19 U35.20
copper on no net: | length 3.7
  Top Layer w0.152: v1@30.912,82.018 31.11,81.208 v1@31.307,82.018 ; 31.11,80.005 v1(31.11,82.042)
  other v1: 56.134,78.232

## Polygon pours and split planes (outlines as drawn)
GND on Top Layer "Top-GND" (solid, remove dead copper, pour order 1000): 27.051,21.336 34.925,21.336 34.925,27.305 27.051,27.305
GND on Top Layer "Top-GND 1" (solid, remove dead copper, pour order 1001): 0,63.373 0,70.993 64.262,70.993 64.262,47.498 0,47.498 0,54.102 4.572,54.102 4.572,50.8 60.96,50.8 60.96,67.691 4.572,67.691 4.572,63.373
GND on Top Layer "Top-GND 2" (solid, remove dead copper, pour order 1002): 7.493,41.021 16.002,41.021 16.891,40.132 62.611,40.132 60.452,42.291 7.493,42.291
+5V on Top Layer "Top-+5V" (solid, remove dead copper, pour order 1003): 104.14,10.795 104.14,17.526 93.345,17.526 93.345,10.795
4V2_Q on Top Layer "Top-4V2_Q" (solid, remove dead copper, pour order 1004): 38.608,23.368 38.608,21.463 35.052,21.463 35.052,27.432 26.924,27.432 26.924,26.924 22.733,26.924 22.733,27.559 20.828,27.559 20.828,28.448 26.797,28.448 26.797,29.718 37.846,29.718 37.846,26.035 37.719,26.035 37.719,23.368
GND on Top Layer "Top-GND 3" (solid, remove dead copper, pour order 1005): 24.511,19.177 42.291,19.177 42.291,14.732 29.21,14.732 29.21,17.907 24.511,17.907
GND on Top Layer "Top-GND 4" (solid, remove dead copper, pour order 1006): 24.511,56.896 42.291,56.896 42.291,52.451 29.21,52.451 29.21,55.626 24.511,55.626
GND on Top Layer "Top-GND 5" (solid, remove dead copper, pour order 1007): 7.366,34.417 7.366,37.211 14.986,37.211 14.986,35.433 16.383,35.433 17.272,36.322 68.072,36.322 68.072,35.687 66.802,34.417
GND on Top Layer "Top-GND 6" (solid, remove dead copper, pour order 1008): 98.933,85.725 98.933,75.565 113.665,75.565 113.665,77.089 126.746,77.089 126.746,85.725
2V5_IN on Top Layer "Top-2V5_IN" (solid, remove dead copper, pour order 1009): 109.347,74.676 109.347,70.739 123.444,70.739 123.444,74.676
+2V5 on Top Layer "Top-+2V5" (solid, remove dead copper, pour order 1010): 104.14,75.057 104.14,70.866 97.409,70.866 97.409,75.057
GND on Top Layer "Top-GND 7" (solid, remove dead copper, pour order 1011): 93.345,10.414 108.966,10.414 108.966,8.255 126.873,8.255 126.873,0.127 93.345,0.127
2V5_FILT on Top Layer "Top-2V5_FILT" (solid, remove dead copper, pour order 1012): 104.648,72.009 104.648,75.057 109.093,75.057 109.093,73.787 108.839,73.787 108.839,72.009
GND on Top Layer "Top-GND 8" (solid, remove dead copper, pour order 1013): 0,25.781 0,33.401 64.262,33.401 64.262,9.906 0,9.906 0,16.51 4.572,16.51 4.572,13.208 60.96,13.208 60.96,30.099 4.572,30.099 4.572,25.781
GND on Top Layer "Top-GND 9" (solid, remove dead copper, pour order 1014): 38.862,29.591 38.862,25.908 38.227,25.908 38.227,23.495 38.862,23.495 38.862,21.463 43.561,21.463 43.561,29.591
5V_FILT on Top Layer "Top-5V_FILT" (solid, remove dead copper, pour order 1015): 104.521,13.97 104.521,10.795 109.093,10.795 109.093,13.97
GND on Top Layer "Top-GND 10" (solid, remove dead copper, pour order 1017): 38.834,63.318 38.199,63.318 38.199,61.032 38.961,61.032 38.961,59 43.66,59 43.66,67.001 38.834,67.001
4V2_I on Top Layer "Top-4V2_I" (solid, remove dead copper, pour order 1018): 38.735,61.087 38.735,59.055 35.052,59.055 35.052,65.278 26.797,65.278 26.797,64.516 22.733,64.516 22.733,65.151 20.955,65.151 20.955,66.421 22.606,66.421 22.606,66.167 26.797,66.167 26.797,67.183 37.846,67.183 37.846,61.087
GND on Top Layer "Top-GND 11" (solid, remove dead copper, pour order 1019): 27.051,59.055 34.925,59.055 34.925,65.024 27.051,65.024
5V_IN on Top Layer "Top-5V_IN" (solid, remove dead copper, pour order 1016): 109.3,13.9 109.3,8.5 123.2,8.5 123.2,12.1 114,12.1 114,13.9
GND on Bottom Layer "Bottom-GND" (solid, remove dead copper, pour order 1020): 20.955,60.579 24.003,60.579 24.003,57.531 20.955,57.531
GND on Bottom Layer "Bottom-GND 1" (solid, remove dead copper, pour order 1021): 52.324,77.597 55.372,77.597 55.372,74.549 52.324,74.549
GND on Bottom Layer "Bottom-GND 2" (solid, remove dead copper, pour order 1022): 27.686,79.629 30.734,79.629 30.734,76.581 27.686,76.581
GND on Bottom Layer "Bottom-GND 3" (solid, remove dead copper, pour order 1023): 20.955,22.987 24.003,22.987 24.003,19.939 20.955,19.939
GND on Bottom Layer "Bottom-GND 4" (solid, remove dead copper, pour order 1024): 10.287,61.341 10.287,60.198 9.398,60.198 9.398,59.055 10.287,59.055 10.287,57.912 12.065,57.912 12.065,61.341
GND on Bottom Layer "Bottom-GND 5" (solid, remove dead copper, pour order 1025): 10.287,23.749 10.287,22.606 9.398,22.606 9.398,21.336 10.287,21.336 10.287,20.32 12.065,20.32 12.065,23.749
GND on Bottom Layer "Bottom-GND 6" (solid, remove dead copper, pour order 1026): 73.787,72.136 76.835,72.136 76.835,69.088 73.787,69.088
GND on InnerPlane1 (split plane): 126.498,0.502 0.502,0.502 0.502,85.348 126.498,85.348
+5V on InnerPlane2 (split plane): 126.498,0.502 0.502,0.502 0.502,85.348 126.498,85.348
+3V on InnerPlane3 (split plane): 39.88,0.502 0.502,0.502 0.502,85.348 39.88,85.348
+2V5 on InnerPlane3 (split plane): 126.498,0.502 96.772,0.502 96.772,65.68 96.764,65.745 96.738,65.806 96.698,65.858 92.278,70.278 92.226,70.318 92.165,70.344 92.1,70.352 92.099,70.352 82.423,70.352 66.294,70.352 66.229,70.344 66.197,70.33 66.165,70.344 66.1,70.352 53.452,70.352 53.452,85.348 126.498,85.348
+1V9 on InnerPlane3 (split plane): 52.948,70.1 52.956,70.035 52.982,69.974 53.022,69.922 53.074,69.882 53.135,69.856 53.2,69.848 65.996,69.848 66.042,69.802 66.042,51.435 66.042,51.41 66.05,51.345 66.076,51.284 66.116,51.232 66.168,51.192 66.229,51.167 66.294,51.158 77.218,51.158 77.218,25.449 69.723,25.449 69.658,25.44 69.597,25.415 69.545,25.375 69.505,25.323 69.479,25.262 69.471,25.197 69.471,0.502 40.384,0.502 40.384,85.348 52.948,85.348
+1V9D on InnerPlane3 (split plane): 96.268,65.576 96.268,0.502 69.975,0.502 69.975,24.945 77.47,24.945 77.535,24.953 77.596,24.978 77.648,25.018 77.688,25.071 77.714,25.132 77.722,25.197 77.722,51.41 77.722,51.435 77.714,51.5 77.688,51.561 77.648,51.613 77.596,51.653 77.535,51.679 77.47,51.687 66.546,51.687 66.546,69.848 82.423,69.848 82.424,69.848 91.995,69.848
GND on InnerPlane4 (split plane): 126.498,0.502 0.502,0.502 0.502,85.348 126.498,85.348

## Other copper
Top Layer:
  text ".Layer_Name" at -0.012,87.793 h1.5
Bottom Layer:
  region net GND: 80.391,42.291 86.487,42.291 86.487,36.195 80.391,36.195
  text ".Layer_Name" at 0.25,87.75 h1.5
InnerPlane3 (plane layer: these items are gaps in the copper):
  lines w0.5: 82.423,85.852 127,85.852 127,0 96.52,0 ; 90.7,70.1 92.1,70.1 ; 40.132,0 0,0 0,85.852 40.132,85.852 ; 40.132,0 40.132,85.852 ; 40.132,0 40.132,85.852 ; 40.132,0 69.723,0 69.723,25.197 ; 40.132,85.852 53.2,85.852 53.2,70.1 66.1,70.1 66.294,69.906 66.294,51.435 77.47,51.435 77.47,25.197 ; 69.723,25.197 77.47,25.197 ; 69.723,25.197 69.723,-0.025 96.52,-0.025 96.52,65.68 92.1,70.1 ; 69.723,25.197 77.47,25.197 ; 77.47,25.197 77.47,51.41 66.294,51.41 66.294,70.1 82.423,70.1 92.1,70.1 ; 92.1,70.1 92.1,70.1
  text ".Layer_Name" at 0.25,87.75 h1.5
InnerPlane1 (plane layer: these items are gaps in the copper):
  text ".Layer_Name" at 0.25,87.75 h1.5
InnerPlane2 (plane layer: these items are gaps in the copper):
  text ".Layer_Name" at 0.25,87.75 h1.5
InnerPlane4 (plane layer: these items are gaps in the copper):
  text ".Layer_Name" at 0.25,87.75 h1.5

## Silkscreen, mask and mechanical layers (free items; w line width, h text height)
Top Overlay:
  circle w0.2: c66,2.5 r1.5
  text ".Layer_Name" at 0,87.75 h1.5
  text "SYNC/PPS" at 0.75,84 h1.4
  text "KATADC V1.3" at 61.75,82.75 h2.25
  text "I INPUT" at 5.5,51.75 h1.4
  text "CLOCK/FS" at 0.75,44.5 h1.4
  text "SERIAL" at 33,44 h3
  text "NO." at 33,41 h3
  text "Q INPUT" at 5.5,14.25 h1.4
  text "MEERKAT PROJECT" at 36.5,6 h2
  text "CAPE TOWN SOUTH AFRICA" at 35.5,3.75 h1.6
  text "E. BAUERMEISTER, F. KAPP" at 35.75,2 h1.6
  text "C   2010" at 65.5,2 h1.75
Bottom Overlay:
  text ".Layer_Name" at 0.25,87.75 h1.5
  text "KATADC V1.3" at 74.5,82.75 h2.25
  text "SERIAL" at 63,44 h3
  text "NO." at 63,41 h3
  text "MEERKAT PROJECT" at 53.75,6 h2
Top Solder:
  region: 0,16.51 4.572,16.51 4.572,13.208 60.96,13.208 60.96,24.638 64.262,27.94 64.262,9.906 0,9.906 0,16.51
  region: 0,54.102 4.572,54.102 4.572,50.8 60.706,50.8 64.008,47.498 0,47.498 0,54.102
  region: 0,25.781 4.572,25.781 4.572,30.099 60.96,30.099 60.96,27.94 64.262,31.242 64.262,33.401 0,33.401 0,25.781
  region: 0,63.373 4.572,63.373 4.572,67.691 60.96,67.691 60.96,53.848 64.262,50.546 64.262,70.993 0,70.993 0,63.373
  text ".Layer_Name" at 0,87.75 h1.5
  text "EDA" at 0.75,0.875 h1.2
Bottom Solder:
  text ".Layer_Name" at 0,87.75 h1.5
PCB Outline:
  the board outline again, w0.025
Mechanical Data 2:
  the board outline again, w0.5
  text ".PCB_Title_Date" at -0.012,95.743 h1.5
  text ".COMPANY_NAME1" at -0.012,93.743 h1.5
  text ".PCB_Title_Description" at -0.012,91.743 h1.5
  text ".GERBER FILENAME" at -0.012,89.743 h1.5
  text "DO NOT ADJUST THIS EDGE - CRITICAL ALIGNMENT" at -0.762,18.669 h1.27 r90